# EAGLE board calculator2 (EAGLE 9.6.2)
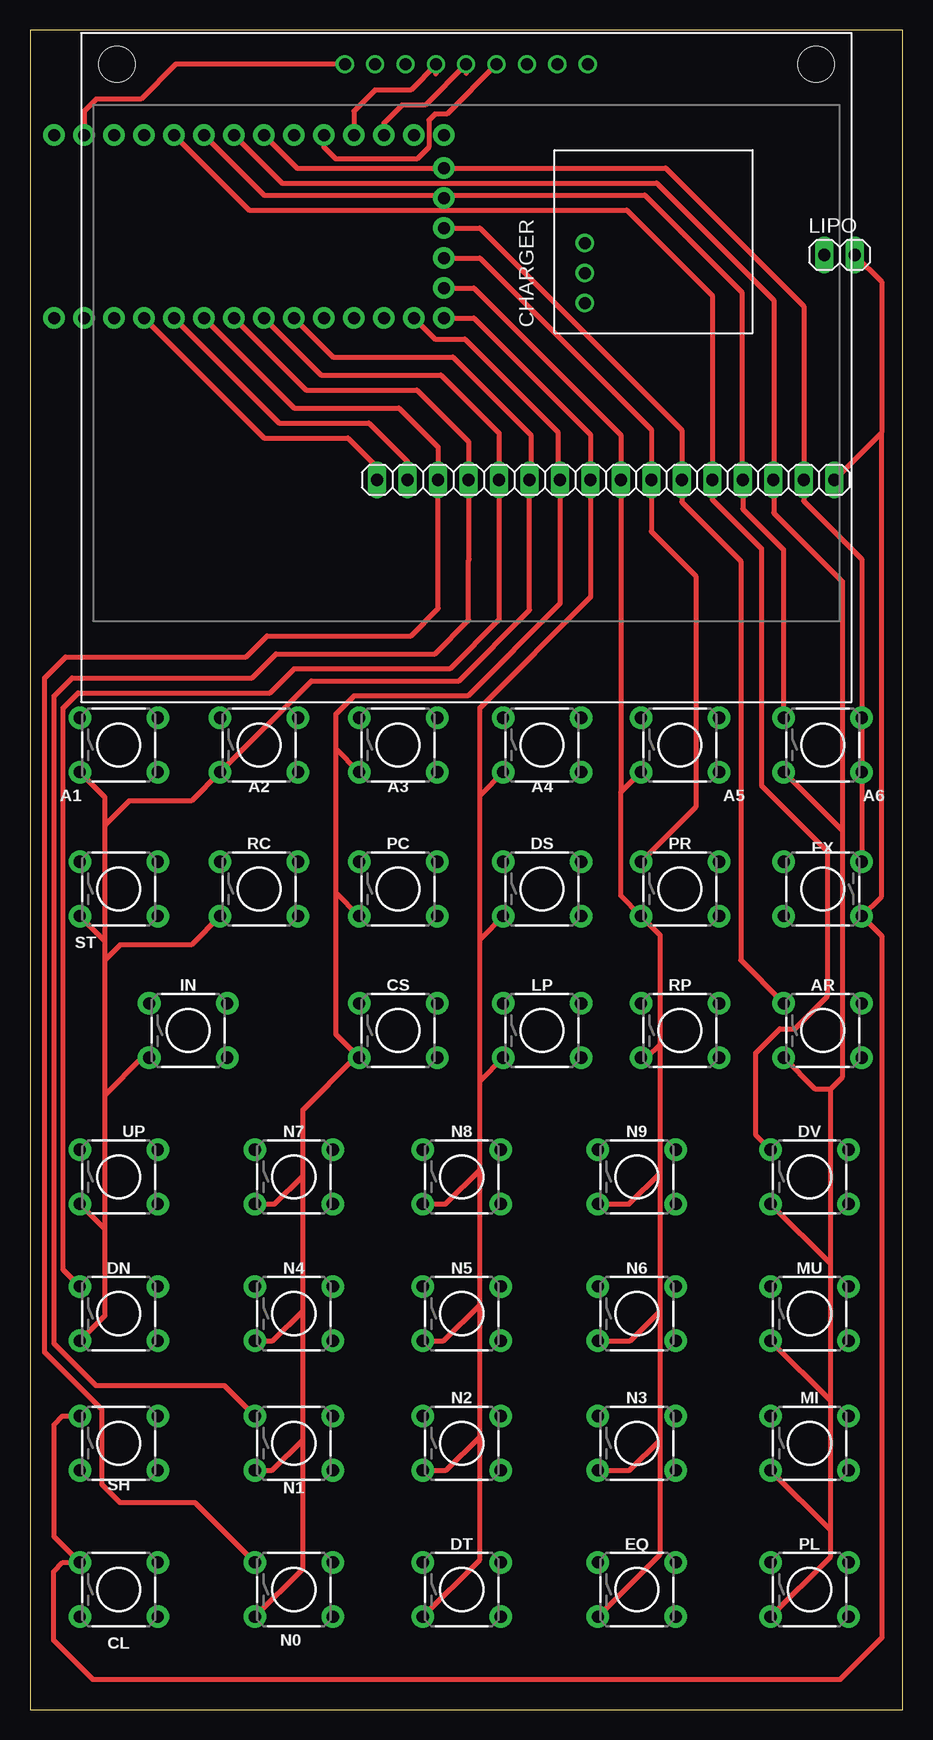
[diagram p0: board, top side]
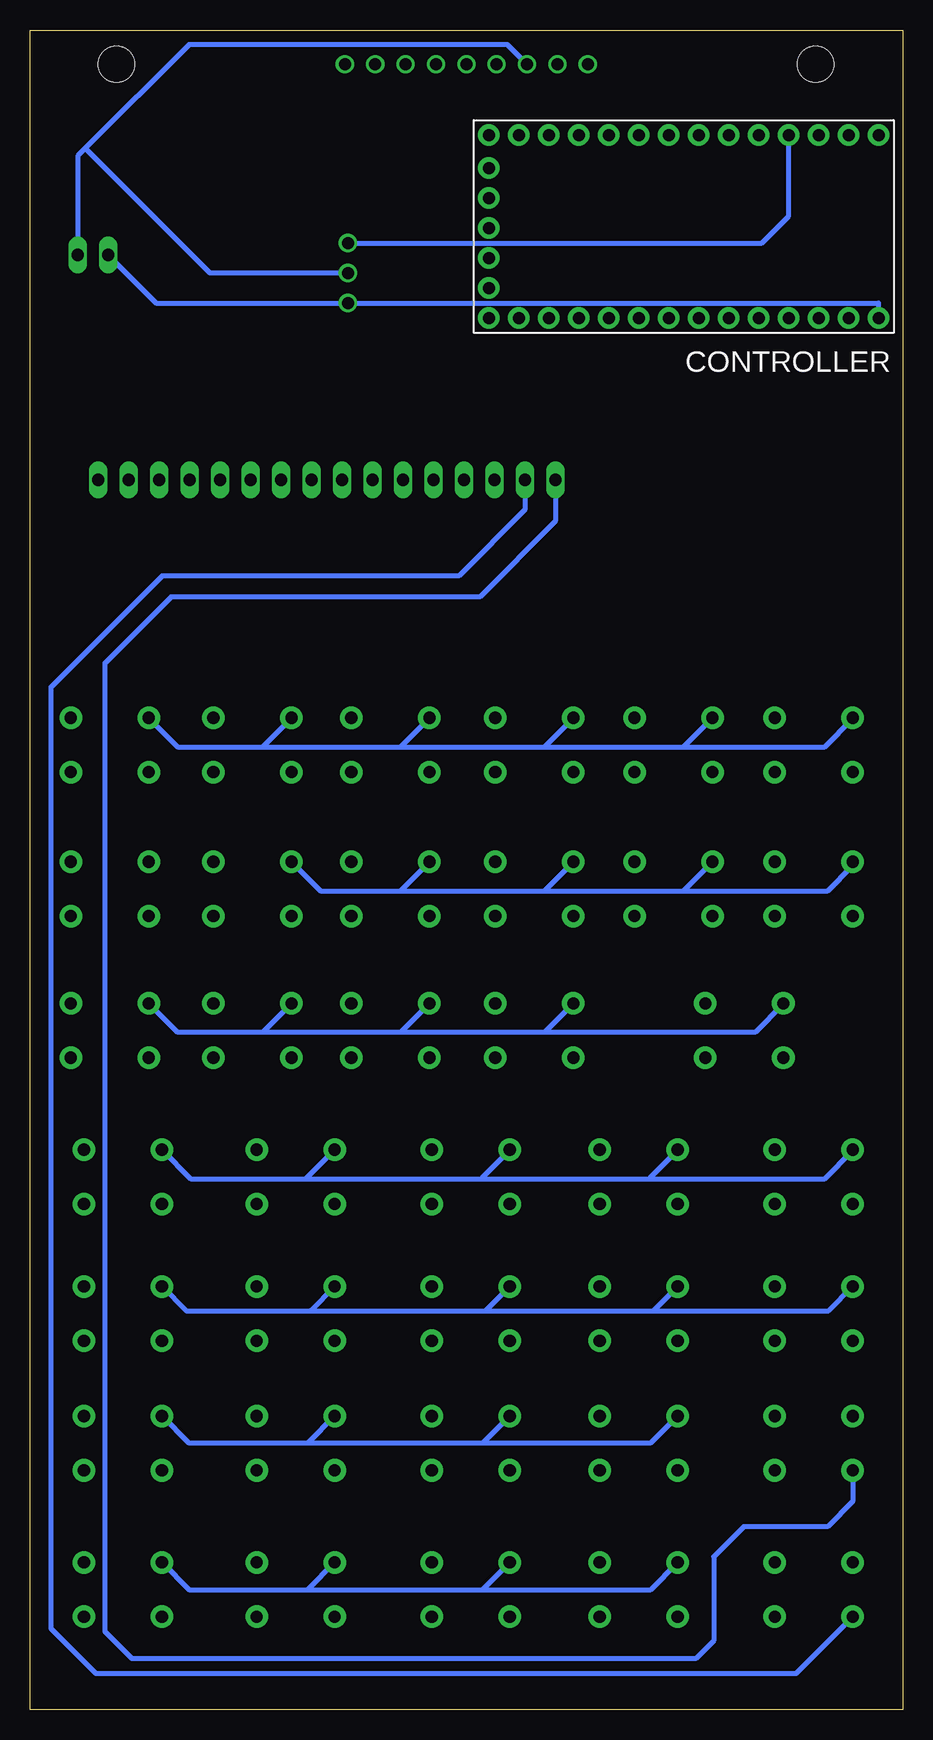
[diagram p1: board, bottom side, seen from below]

Size 72.75 x 140 mm. Coordinates in mm from the lower left corner, seen from the top.
Outline: 0,0 72.75,0 72.75,140 0,140 0,0
Copper layers (1*16): Top 0.035mm / dielectric 1.5mm / Bottom 0.035mm
Design rules "default": minimum track width 6mil, minimum drill 0.35mm, track to track 6mil, track to pad 6mil, pad to pad 6mil, via to via 6mil, smd to smd 6mil, copper to edge 40mil, drill to drill 6mil, minimum pad ring 10mil, minimum via ring 8mil, stop-mask expansion 4mil, vias tented up to drill 0mil, thermal gap 10mil

## Footprints (pad centres in the part's own frame; a part is rotated, then mirrored left to right if it is on the bottom)
TACTILE_SWITCH_PTH_6.0MM = drill 1.016 pad 1.88: 1 -3.251,2.261; 2 3.251,2.261; 3 -3.251,-2.261; 4 3.251,-2.261
PROTRINKET = drill 1: +5V 7.5,14; BAT 2.5,14; GND 5,14
IB32U4 = drill 1 pad 1.778: 0 33.75,16.5; 1 31.25,16.5; 2 28.75,16.5; 3 26.25,16.5; 3V3 3.75,1.25; 4 33.75,14; 5 23.75,16.5; 6 33.75,11.5; 7 21.25,16.5; 8 33.75,9; 9 18.75,16.5; 10 16.25,16.5; 11 13.75,16.5; 12 11.25,16.5; 13 8.75,16.5; A0 11.25,1.25; A1 13.75,1.25; A2 16.25,1.25; A3 18.75,1.25; A4 21.25,1.25; A5 23.75,1.25; AREF 6.25,1.25; BAT 1.25,16.5; EN 33.75,4; GND@2 3.75,16.5; GND@18 33.75,6.5; GND@20 33.75,1.25; MI 31.25,1.25; MO 28.75,1.25; RST 1.25,1.25; SCK 26.25,1.25; USB 6.25,16.5; VHI 8.75,1.25
1X16 = drill 1.016 long: 1 -19.05,0; 2 -16.51,0; 3 -13.97,0; 4 -11.43,0; 5 -8.89,0; 6 -6.35,0; 7 -3.81,0; 8 -1.27,0; 9 1.27,0; 10 3.81,0; 11 6.35,0; 12 8.89,0; 13 11.43,0; 14 13.97,0; 15 16.51,0; 16 19.05,0
1X02 = drill 1.016 long: 1 -1.27,0; 2 1.27,0
SHARPMEM = drill 1: 3V3 24.53,53.15; CS 34.65,53.15; DISP 39.71,53.15; EIN 42.25,53.15; EMD 37.18,53.15; GND 27.06,53.15; MOSI 32.12,53.15; SLCK 29.59,53.15; VIN 22,53.15 | hole 3: 3,53.15; 61.3,53.15

## Placement (x,y rotation side)
A1  [TACTILE_SWITCH_PTH_6.0MM]  7.4,80.4 0 top
A2  [TACTILE_SWITCH_PTH_6.0MM]  19.1,80.4 0 top
A3  [TACTILE_SWITCH_PTH_6.0MM]  30.7,80.4 0 top
A4  [TACTILE_SWITCH_PTH_6.0MM]  42.7,80.4 0 top
A5  [TACTILE_SWITCH_PTH_6.0MM]  54.2,80.4 0 top
A6  [TACTILE_SWITCH_PTH_6.0MM]  66.1,80.4 0 top
AR  [TACTILE_SWITCH_PTH_6.0MM]  66.1,56.6 0 top
CHARGER  PROTRINKET  [PROTRINKET]  60.25,114.75 90 top
CL  [TACTILE_SWITCH_PTH_6.0MM]  7.4,10 0 top
CONTROLLER  IB32U4  [IB32U4]  0.75,132.5 180 bottom
CS  [TACTILE_SWITCH_PTH_6.0MM]  30.7,56.6 0 top
DN  [TACTILE_SWITCH_PTH_6.0MM]  7.4,33 0 top
DS  [TACTILE_SWITCH_PTH_6.0MM]  42.7,68.4 0 top
DT  [TACTILE_SWITCH_PTH_6.0MM]  36,10 0 top
DV  [TACTILE_SWITCH_PTH_6.0MM]  65,44.4 0 top
EQ  [TACTILE_SWITCH_PTH_6.0MM]  50.6,10 0 top
EX  [TACTILE_SWITCH_PTH_6.0MM]  66.1,68.4 180 top
IN  [TACTILE_SWITCH_PTH_6.0MM]  13.19,56.6 0 top
JP3  [1X16]  48,102.5 0 top
LIPO  [1X02]  67.5,121.25 0 top
LP  [TACTILE_SWITCH_PTH_6.0MM]  42.7,56.6 0 top
MI  [TACTILE_SWITCH_PTH_6.0MM]  65,22.2 0 top
MU  [TACTILE_SWITCH_PTH_6.0MM]  65,33 0 top
N0  [TACTILE_SWITCH_PTH_6.0MM]  22,10 0 top
N1  [TACTILE_SWITCH_PTH_6.0MM]  22,22.2 0 top
N2  [TACTILE_SWITCH_PTH_6.0MM]  36,22.2 0 top
N3  [TACTILE_SWITCH_PTH_6.0MM]  50.6,22.2 0 top
N4  [TACTILE_SWITCH_PTH_6.0MM]  22,33 0 top
N5  [TACTILE_SWITCH_PTH_6.0MM]  36,33 0 top
N6  [TACTILE_SWITCH_PTH_6.0MM]  50.6,33 0 top
N7  [TACTILE_SWITCH_PTH_6.0MM]  22,44.4 0 top
N8  [TACTILE_SWITCH_PTH_6.0MM]  36,44.4 0 top
N9  [TACTILE_SWITCH_PTH_6.0MM]  50.6,44.4 0 top
PC  [TACTILE_SWITCH_PTH_6.0MM]  30.7,68.4 0 top
PL  [TACTILE_SWITCH_PTH_6.0MM]  65,10 0 top
PR  [TACTILE_SWITCH_PTH_6.0MM]  54.2,68.4 0 top
RC  [TACTILE_SWITCH_PTH_6.0MM]  19.1,68.4 0 top
RP  [TACTILE_SWITCH_PTH_6.0MM]  54.2,56.6 0 top
SH  [TACTILE_SWITCH_PTH_6.0MM]  7.4,22.2 0 top
SHARPMEM  SHARPMEM  [SHARPMEM]  4.25,84 0 top
ST  [TACTILE_SWITCH_PTH_6.0MM]  7.4,68.4 0 top
UP  [TACTILE_SWITCH_PTH_6.0MM]  7.4,44.4 0 top

## Library data of the parts
A1-A6 AR CL CS DN DS DT DV EQ EX IN LP MI MU N0 N1-N9 PC PL PR RC RP SH ST UP = SparkFun-Switches; PROD_ID: SWCH-08441; SF_SKU: COM-00097
CHARGER CONTROLLER SHARPMEM = pwlib
JP3 LIPO = pinhead

## Nets
3V3: CONTROLLER.3V3 SHARPMEM.VIN
C1: A1.3 A2.3 CONTROLLER.7 DN.3 IN.3 JP3.6 RC.3 ST.3 UP.3
C2: A3.3 CONTROLLER.1 CS.3 JP3.7 N0.3 N1.3 N4.3 N7.3 PC.3
C3: A4.3 CONTROLLER.0 DS.3 DT.3 JP3.8 LP.3 N2.3 N5.3 N8.3
C4: A5.3 CONTROLLER.4 EQ.3 JP3.9 N3.3 N6.3 N9.3 PR.3 RP.3
C5: A6.3 AR.3 CONTROLLER.A2 DV.3 JP3.14 MI.3 MU.3 PL.3
CL: CL.3 CONTROLLER.12 JP3.2
CS: CONTROLLER.A5 SHARPMEM.CS
EX: CONTROLLER.A3 EX.3 JP3.15
GND: CHARGER.GND CL.1 EX.1 JP3.16 LIPO.2 SH.1 SHARPMEM.GND
MOSI: CONTROLLER.MO SHARPMEM.MOSI
N$1: CHARGER.BAT CONTROLLER.BAT LIPO.1
R1: A1.1 A2.1 A3.1 A4.1 A5.1 A6.1 CONTROLLER.A1 JP3.13
R2: CONTROLLER.6 DS.1 JP3.10 PC.1 PR.1 RC.1 ST.1
R3: AR.1 CONTROLLER.8 CS.1 IN.1 JP3.11 LP.1 RP.1
R4: CONTROLLER.A0 DV.1 JP3.12 N7.1 N8.1 N9.1 UP.1
R5: CONTROLLER.9 DN.1 JP3.5 MU.1 N4.1 N5.1 N6.1
R6: CONTROLLER.10 JP3.4 MI.1 N1.1 N2.1 N3.1
R7: CONTROLLER.11 DT.1 EQ.1 JP3.3 N0.1 PL.1
SH: CONTROLLER.13 JP3.1 SH.3
SLCK: CONTROLLER.SCK SHARPMEM.SLCK
VHI: CHARGER.+5V CONTROLLER.VHI

## Tracks (layer width: path | path; a pad name or v marks a point on that pad's centre or on a via)
3V3
  Top 0.406: SHARPMEM.VIN 12.15,137.15 9.25,134.25 5.5,134.25 4.5,133.25 CONTROLLER.3V3
C1
  Top 0.406: DN.3 6.25,32.84 6.25,40.04 | A1.3 6.25,76.04 6.25,73.75 | 6.25,40.04 6.25,51.25 | 6.25,51.25 6.25,62.5 | 6.25,62.5 6.25,64.04 | 6.25,64.04 6.25,73.75 | UP.3 6.25,40.04 | ST.3 6.25,64.04 | 6.25,51.25 9.34,54.34 IN.3 | RC.3 13.46,63.75 7.5,63.75 6.25,62.5 | 6.25,73.75 8.25,75.75 13.46,75.75 A2.3 23.46,85.75 35.75,85.75 41.65,91.65 41.65,102.25 | 41.65,102.25 JP3.6 | CONTROLLER.7 25.25,112.75 35.25,112.75 41.75,106.25 41.75,102.35 41.65,102.25
C2
  Top 0.406: N0.3 22.75,11.74 22.75,22.5 | 22.75,22.5 22.75,33.25 | 22.75,33.25 22.75,44.5 | 22.75,44.5 22.75,50 27.09,54.34 CS.3 25.5,56.29 25.5,68.09 | N1.3 20.19,19.94 22.75,22.5 | N4.3 20.24,30.74 22.75,33.25 | N7.3 20.39,42.14 22.75,44.5 | 25.5,68.09 25.5,80.09 | 25.5,80.09 25.5,83 27,84.5 36.5,84.5 44.19,92.19 JP3.7 44,102.69 44,106.5 36.25,114.25 33.75,114.25 CONTROLLER.1 | PC.3 25.5,68.09 | A3.3 25.5,80.09
C3
  Top 0.406: DT.3 37.5,12.49 37.5,22.75 | LP.3 37.5,52.39 | 37.5,22.75 37.5,33.75 | 37.5,33.75 37.5,45 | 37.5,45 37.5,52.39 | N2.3 34.69,19.94 37.5,22.75 | N5.3 34.49,30.74 37.5,33.75 | N8.3 34.64,42.14 37.5,45 | 37.5,52.39 37.5,64.19 | 37.5,64.19 37.5,76.19 | 37.5,76.19 37.5,83.5 46.73,92.73 JP3.8 46.73,106.27 37,116 CONTROLLER.0 | DS.3 37.5,64.19 | A4.3 37.5,76.19
C4
  Top 0.406: EQ.3 52.56,12.95 52.56,22.5 | 52.56,22.5 52.56,33.25 | 52.56,33.25 52.56,44.75 | 52.56,44.75 52.56,55.5 | 52.56,55.5 52.56,64.53 PR.3 49.25,67.84 49.25,76.44 49.27,76.46 | N3.3 49.99,19.94 52.56,22.5 | N6.3 50.05,30.74 52.56,33.25 | N9.3 49.95,42.14 52.56,44.75 | RP.3 51.4,54.34 52.56,55.5 | A5.3 49.27,76.46 | JP3.9 49.27,102.25 49.27,76.46 | 49.25,102.52 JP3.9 | CONTROLLER.4 37,118.5 49.27,106.23 JP3.9
C5
  Top 0.406: PL.3 66.75,12.74 66.75,14.94 | 66.75,14.94 66.75,25.74 | 66.75,25.74 66.75,37.14 | 66.75,37.14 66.75,51.75 | 66.75,51.75 67.75,52.75 67.75,73.24 | 67.75,73.24 67.75,94 62,99.75 62,102.47 | JP3.14 62,102.47 | A6.3 67.75,73.24 | AR.3 65.44,51.75 66.75,51.75 | DV.3 66.75,37.14 | MU.3 66.75,25.74 | MI.3 66.75,14.94 | CONTROLLER.A2 21,127.25 52.25,127.25 62,117.5 62,102.47
CL
  Top 0.406: CONTROLLER.12 20.75,107.25 28.25,107.25 31.49,104.01 JP3.2
  Bottom 0.406: CL.3 8.89,3 67.25,3 71,6.75 71,85.25 61.75,94.5 37,94.5 31.49,100.01 JP3.2
CS
  Top 0.406: 38.9,136.9 SHARPMEM.CS 34.75,133 33.75,133 33.25,132.5 33.25,130.25 32.25,129.25 25.5,129.25 24.5,130.25 CONTROLLER.A5
EX
  Top 0.406: 64.51,101.75 JP3.15 64.51,116.99 53,128.5 22.25,128.5 CONTROLLER.A3 | 64.51,101.75 64.51,100.74 69.35,95.9 EX.3 | 64.5,101.76 64.51,101.75
GND
  Top 0.406: SH.1 2.71,24.46 2,23.75 2,14.41 CL.1 2.73,12.26 1.97,11.5 1.97,5.78 5.25,2.5 67.53,2.5 71.03,6 71.03,64.46 EX.1 71,67.79 71,106.45 | JP3.16 71,106.45 | LIPO.2 71,119.02 71,106.45
  Bottom 0.406: SHARPMEM.GND 32.94,138.78 59.5,138.78 68.14,130.14 | 68.14,130.14 68.77,129.51 LIPO.2 | CHARGER.GND 57.75,119.75 68.14,130.14
MOSI
  Top 0.406: 36.37,136.37 SHARPMEM.MOSI 32.97,133.75 31,133.75 29.5,132.25 CONTROLLER.MO
N$1
  Bottom 0.406: LIPO.1 62.23,117.25 CHARGER.BAT 2,117.25 CONTROLLER.BAT
R1
  Top 0.406: A6.1 62.85,96.65 59.43,100.07 JP3.13 59.34,102.59 | 59.25,102.68 59.34,102.59 | CONTROLLER.A1 19.5,126.25 51.25,126.25 59.34,118.16 59.34,102.59
  Bottom 0.406: A6.1 60.44,80.25 53.36,80.25 | 53.36,80.25 41.86,80.25 | 41.86,80.25 29.86,80.25 | 29.86,80.25 18.26,80.25 | 18.26,80.25 6.5,80.25 4.15,82.6 A1.1 | A2.1 18.26,80.25 | A3.1 29.86,80.25 | A4.1 41.86,80.25 | A5.1 53.36,80.25
R2
  Top 0.406: PR.1 55.5,75.21 55.5,94.5 51.81,98.19 51.81,102.25 JP3.10 51.81,106.69 37.5,121 CONTROLLER.6
  Bottom 0.406: PR.1 48.54,68.25 41.86,68.25 | 41.86,68.25 29.86,68.25 | 29.86,68.25 18.26,68.25 | 18.26,68.25 6.25,68.25 4.15,70.35 ST.1 | RC.1 18.26,68.25 | PC.1 29.86,68.25 | DS.1 41.86,68.25
R3
  Top 0.406: AR.1 59.25,62.46 59.25,95.75 54.35,100.65 JP3.11 | 54.25,102.6 JP3.11 | CONTROLLER.8 37.5,123.5 54.35,106.65 JP3.11
  Bottom 0.406: AR.1 60.49,56.5 53.31,56.5 | 53.31,56.5 41.81,56.5 | 41.81,56.5 29.81,56.5 | 29.81,56.5 12.25,56.5 9.94,58.81 IN.1 | CS.1 29.81,56.5 | LP.1 41.81,56.5 | RP.1 53.31,56.5
R4
  Top 0.406: DV.1 60.5,47.91 60.5,54.75 62.5,56.75 63.75,56.75 66.5,59.5 66.5,71.5 61,77 61,96.75 56.89,100.86 56.89,102.25 JP3.12 56.89,117.86 49.75,125 18.25,125 CONTROLLER.A0
  Bottom 0.406: DV.1 59.34,44.25 49.75,44.25 | 49.75,44.25 35,44.25 | 35,44.25 21,44.25 | 21,44.25 6.5,44.25 4.15,46.6 UP.1 | N9.1 49.75,44.26 49.75,44.25 | N8.1 35,44.41 35,44.25 | N7.1 21,44.41 21,44.25
R5
  Top 0.406: DN.1 2.75,36.66 2.75,83.5 4,84.75 20,84.75 22,86.75 35,86.75 39.11,90.86 JP3.5 39.11,106.39 34.25,111.25 24.25,111.25 CONTROLLER.9
  Bottom 0.406: MU.1 59.74,33.25 49.36,33.25 | 20.76,33.25 N4.1 | 49.36,33.25 34.76,33.25 | 34.76,33.25 20.76,33.25 | 20.76,33.25 6.16,33.25 DN.1 | N5.1 34.76,33.25 | N6.1 49.36,33.25
R6
  Top 0.406: N1.1 16.21,27 5.5,27 2,30.5 2,84.5 3.5,86 18.5,86 20.5,88 33.75,88 36.57,90.82 36.57,95.82 | 36.61,95.86 36.57,95.82 | 36.57,95.82 JP3.4 36.57,105.68 32.25,110 23,110 CONTROLLER.10
  Bottom 0.406: MI.1 59.54,22.25 49.56,22.25 | N1.1 20.96,22.25 34.96,22.25 | 49.56,22.25 34.96,22.25 | N2.1 34.96,22.25 | N3.1 49.56,22.25
R7
  Top 0.406: N0.1 13.76,17.25 7.5,17.25 6,18.75 6,25 1.22,29.78 1.22,86 2.97,87.75 18,87.75 19.75,89.5 31.75,89.5 34.03,91.78 JP3.3 34.03,105.22 30.75,108.5 22,108.5 CONTROLLER.11
  Bottom 0.406: PL.1 59.49,10 49.61,10 | 49.61,10 35.01,10 | 35.01,10 21,10 N0.1 | DT.1 35.01,10 | EQ.1 49.61,10
SH
  Top 0.406: JP3.1 29,102.55 29,103.5 26.5,106 19.5,106 CONTROLLER.13
  Bottom 0.406: SH.3 4.15,17.35 6.25,15.25 13.25,15.25 15.75,12.75 15.75,5.75 17.25,4.25 64.25,4.25 66.5,6.5 66.5,87.25 61,92.75 35.25,92.75 28.95,99.05 JP3.1
SLCK
  Top 0.406: 33.84,136.34 SHARPMEM.SLCK 33.84,137.09 31.75,135 28.75,135 27,133.25 CONTROLLER.SCK
VHI
  Bottom 0.406: CHARGER.+5V 11.75,122.25 9.5,124.5 CONTROLLER.VHI